# EAGLE board Surprising Krunk-Bojo (EAGLE 7.6.0)

Size 73.58 x 520.59 mm. Coordinates in mm from the lower left corner, seen from the top.
Outline: 0,0 56.82,0 56.82,53.33 0,53.33 0,0
Copper layers (1*16): Top 0.035mm / dielectric 1.5mm / Bottom 0.035mm
Design rules "default": minimum track width 10mil, minimum drill 24mil, track to track 8mil, track to pad 8mil, pad to pad 8mil, via to via 8mil, smd to smd 8mil, copper to edge 40mil, drill to drill 8mil, minimum pad ring 10mil, minimum via ring 8mil, stop-mask expansion 4mil, vias tented up to drill 0mil, thermal gap 10mil

## Footprints (pad centres in the part's own frame; a part is rotated, then mirrored left to right if it is on the bottom)
LED5MM = drill 0.813 octagon: A -1.27,0; K 1.27,0
0207/10 = drill 0.813 octagon: 1 -5.08,0; 2 5.08,0
ARDUINO_UNO = drill 1.016 pad 1.88: 0 63.5,50.8; 1 60.96,50.8; 2 58.42,50.8; 3 55.88,50.8; 3.3V 35.56,2.54; 4 53.34,50.8; 5 50.8,50.8; 5V 38.1,2.54; 6 48.26,50.8; 7 45.72,50.8; 8 41.656,50.8; 9 39.116,50.8; 10 36.576,50.8; 11 34.036,50.8; 12 31.496,50.8; 13 28.956,50.8; A0 50.8,2.54; A1 53.34,2.54; A2 55.88,2.54; A3 58.42,2.54; A4 60.96,2.54; A5 63.5,2.54; AREF 23.876,50.8; GND 26.416,50.8; GND. 43.18,2.54; GND.. 40.64,2.54; I/OREF 30.48,2.54; N/C 27.94,2.54; RESET 33.02,2.54; SCL 18.796,50.8; SDA 21.336,50.8; VIN 45.72,2.54 | hole 3.2: 66.04,7.62; 66.04,35.56; 15.24,50.8; 13.97,2.54
DIL16 = drill 0.813 long: 1 -8.89,-3.81; 2 -6.35,-3.81; 3 -3.81,-3.81; 4 -1.27,-3.81; 5 1.27,-3.81; 6 3.81,-3.81; 7 6.35,-3.81; 8 8.89,-3.81; 9 8.89,3.81; 10 6.35,3.81; 11 3.81,3.81; 12 1.27,3.81; 13 -1.27,3.81; 14 -3.81,3.81; 15 -6.35,3.81; 16 -8.89,3.81

## Placement (x,y rotation side)
D1  [LED5MM]  5,35.48 0 top
D2  [LED5MM]  5,48.18 0 top
D3  [LED5MM]  5,60.88 0 top
D4  [LED5MM]  5,73.58 0 top
D5  [LED5MM]  5,86.28 0 top
D6  [LED5MM]  5,98.98 0 top
D7  [LED5MM]  5,111.68 0 top
D8  [LED5MM]  5,124.38 0 top
D9  [LED5MM]  5,137.08 0 top
D10  [LED5MM]  5,149.78 0 top
D11  [LED5MM]  5,162.48 0 top
D12  [LED5MM]  5,175.18 0 top
D13  [LED5MM]  5,187.88 0 top
D14  [LED5MM]  5,200.58 0 top
D15  [LED5MM]  5,213.28 0 top
D16  [LED5MM]  5,225.98 0 top
D17  [LED5MM]  5,238.68 0 top
D18  [LED5MM]  5,251.38 0 top
D19  [LED5MM]  5,264.08 0 top
D20  [LED5MM]  5,276.78 0 top
D21  [LED5MM]  5,289.48 0 top
D22  [LED5MM]  5,302.18 0 top
D23  [LED5MM]  5,314.88 0 top
D24  [LED5MM]  5,327.58 0 top
D25  [LED5MM]  5,340.28 0 top
D26  [LED5MM]  5,352.98 0 top
D27  [LED5MM]  5,365.68 0 top
D28  [LED5MM]  5,378.38 0 top
D29  [LED5MM]  5,391.08 0 top
D30  [LED5MM]  5,403.78 0 top
D31  [LED5MM]  5,543.48 0 top  (outside the outline)
D32  [LED5MM]  5,568.88 0 top  (outside the outline)
D33  [LED5MM]  5,581.58 0 top  (outside the outline)
D34  [LED5MM]  5,594.28 0 top  (outside the outline)
D35  [LED5MM]  5,606.98 0 top  (outside the outline)
D36  [LED5MM]  5,619.68 0 top  (outside the outline)
D37  [LED5MM]  5,632.38 0 top  (outside the outline)
D38  [LED5MM]  5,645.08 0 top  (outside the outline)
R1  330‎Ω  [0207/10]  5,416.48 0 top
R2  330‎Ω  [0207/10]  5,441.88 0 top
R3  330‎Ω  [0207/10]  5,492.68 0 top
R4  330‎Ω  [0207/10]  5,505.38 0 top
R5  330‎Ω  [0207/10]  5,429.18 0 top
R6  330‎Ω  [0207/10]  5,518.08 0 top
R7  330‎Ω  [0207/10]  5,454.58 0 top
R8  330‎Ω  [0207/10]  5,530.78 0 top  (outside the outline)
R10  330‎Ω  [0207/10]  5,556.18 0 top  (outside the outline)
U1  [ARDUINO_UNO]  5,467.28 0 top
U2  [DIL16]  5,10.08 0 top
U3  [ARDUINO_UNO]  5,22.78 0 top
U5  [DIL16]  5,479.98 0 top

## Library data of the parts
D1-D38 R1-R8 R10 U1-U3 U5 = AUTODESK_CIRCUITS_BREADBOARD

## Nets
N$1: U1.5V U5.10 U5.16
N$2: D36.K D37.K D38.K U1.GND.. U5.8 U5.13
N$3: R7.2 U5.1
N$4: R2.2 U5.2
N$5: R5.1 U5.3
N$6: R3.1 U5.4
N$7: R4.1 U5.5
N$8: R6.1 U5.6
N$9: R8.1 U5.7
N$10: R10.1 U5.15
N$11: D31.A R10.2
N$12: D32.A R7.1
N$13: D34.A R5.2
N$14: D35.A R3.2
N$15: D36.A R4.2
N$16: D37.A R6.2
N$17: D38.A R8.2
N$18: D31.K D32.K D35.K
N$19: D35.A R2.1
N$20: U2.10 U2.16 U3.5V
N$21: U1.GND U5.11 U5.12 U5.14
N$22: U2.1
N$23: U2.4
N$24: U2.6
N$25: U2.7
N$26: U2.8
N$27: U2.2
N$28: U2.12 U3.4
N$29: U2.5
N$30: U2.14 U3.2
N$31: U2.3
N$32: U2.9
N$33: U2.11 U3.5
N$34: U2.15
N$35: U2.13 U3.GND

## Tracks (layer width: path | path; a pad name or v marks a point on that pad's centre or on a via)
N$1  (2 unrouted)
N$2  (5 unrouted)
N$3  (1 unrouted)
N$4  (1 unrouted)
N$5  (1 unrouted)
N$6  (1 unrouted)
N$7  (1 unrouted)
N$8  (1 unrouted)
N$9  (1 unrouted)
N$10  (1 unrouted)
N$11  (1 unrouted)
N$12  (1 unrouted)
N$13  (1 unrouted)
N$14  (1 unrouted)
N$15  (1 unrouted)
N$16  (1 unrouted)
N$17  (1 unrouted)
N$18  (2 unrouted)
N$19  (1 unrouted)
N$20  (2 unrouted)
N$21  (3 unrouted)
N$28  (1 unrouted)
N$30  (1 unrouted)
N$33  (1 unrouted)
N$35  (1 unrouted)